# EAGLE board dancing-light-pcb-v2 (EAGLE 8.6.1)
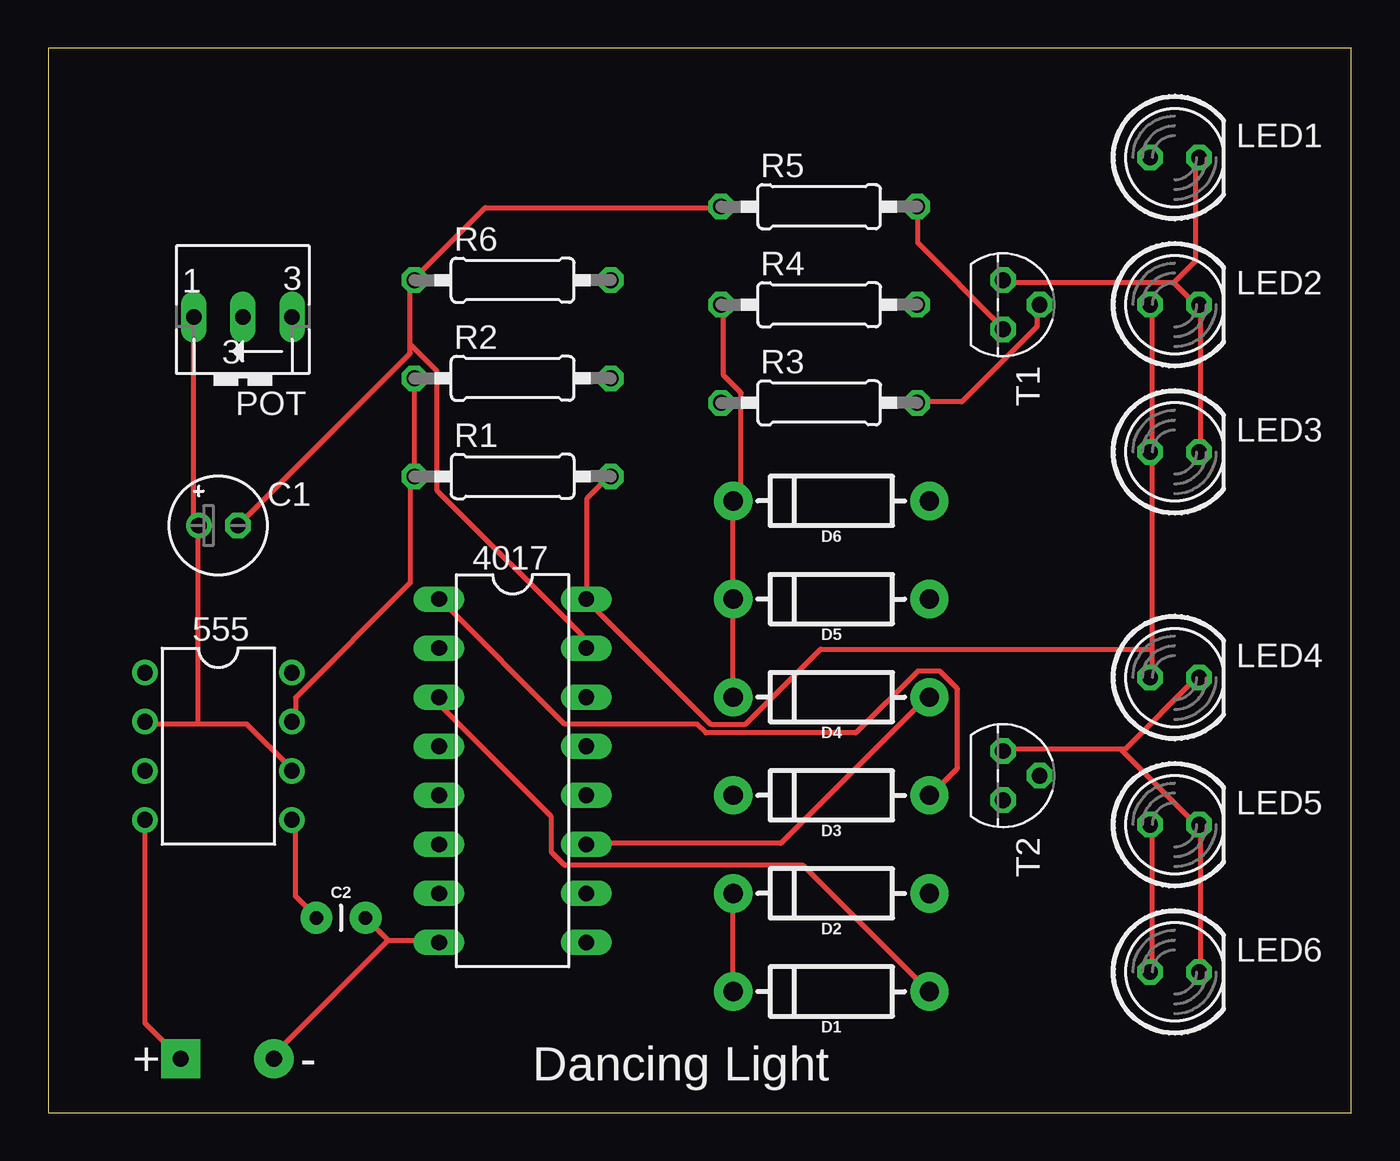
[diagram p0: board, top side]
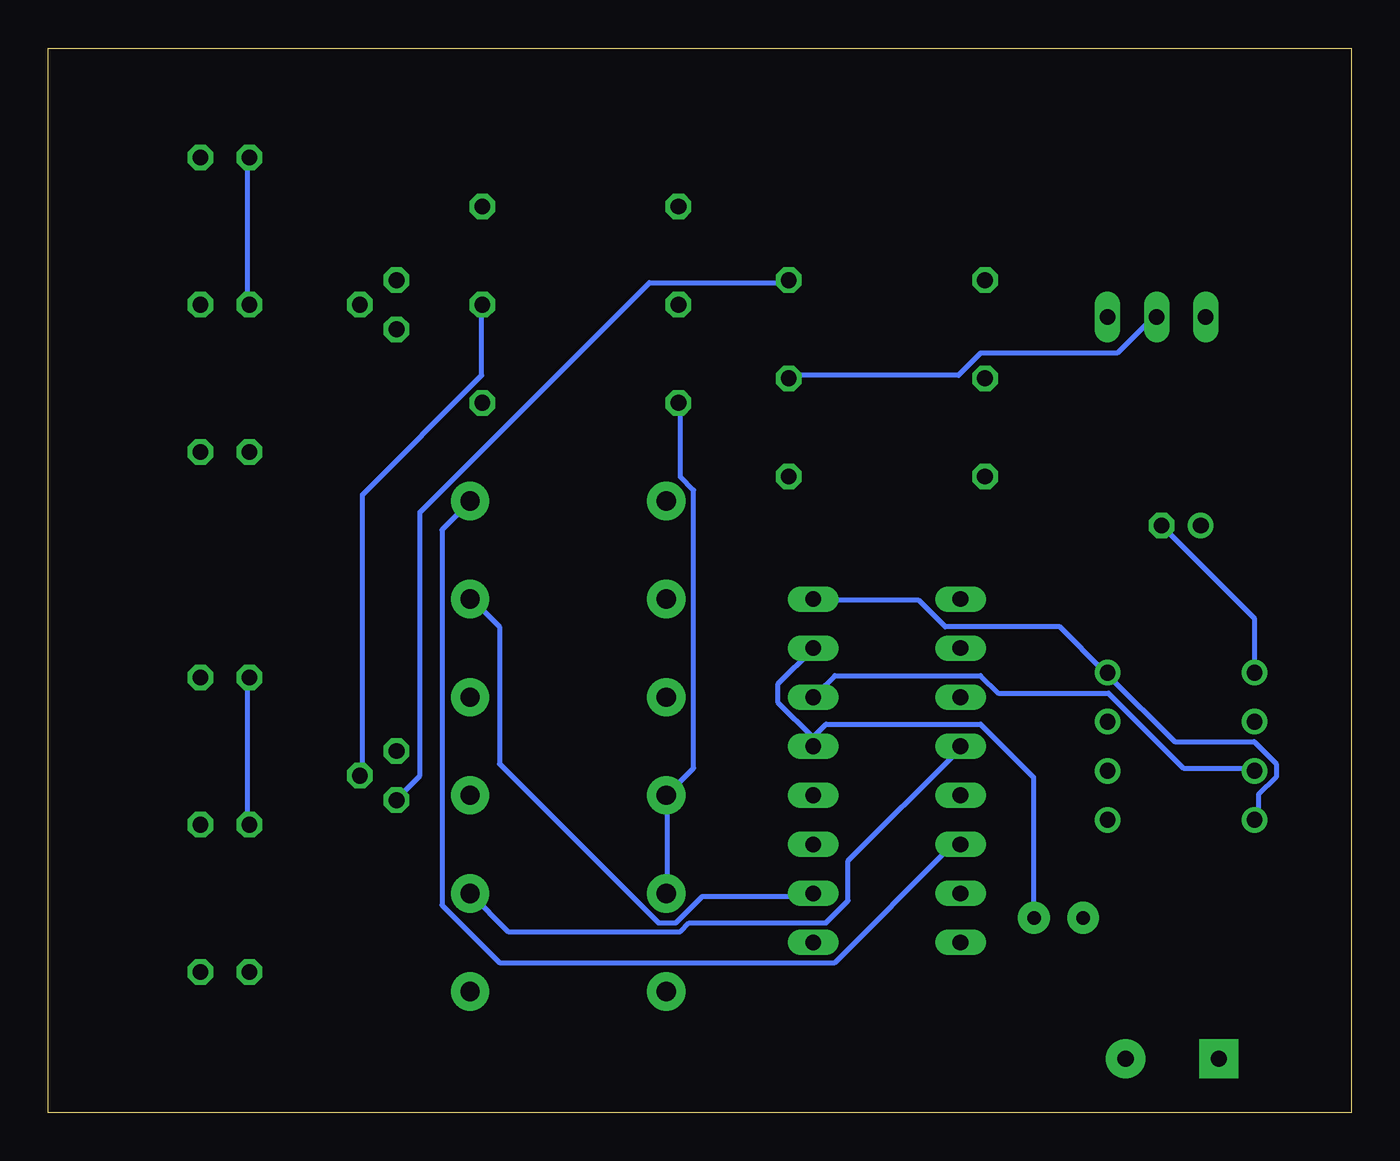
[diagram p1: board, bottom side, seen from below]

Size 67.49 x 55.11 mm. Coordinates in mm from the lower left corner, seen from the top.
Outline: 0,0 67.49,0 67.49,55.11 0,55.11 0,0
Copper layers (1*16): Top 0.035mm / dielectric 1.5mm / Bottom 0.035mm
Design rules "default": minimum track width 10mil, minimum drill 24mil, track to track 8mil, track to pad 8mil, pad to pad 8mil, via to via 8mil, smd to smd 8mil, copper to edge 40mil, drill to drill 8mil, minimum pad ring 10mil, minimum via ring 8mil, stop-mask expansion 4mil, vias tented up to drill 0mil, thermal gap 10mil

## Footprints (pad centres in the part's own frame; a part is rotated, then mirrored left to right if it is on the bottom)
DIL08 = drill 0.813 pad 1.27: 1 -3.81,-3.81; 2 -1.27,-3.81; 3 1.27,-3.81; 4 3.81,-3.81; 5 3.81,3.81; 6 1.27,3.81; 7 -1.27,3.81; 8 -3.81,3.81
DIL16 = drill 0.813 long: 1 -8.89,-3.81; 2 -6.35,-3.81; 3 -3.81,-3.81; 4 -1.27,-3.81; 5 1.27,-3.81; 6 3.81,-3.81; 7 6.35,-3.81; 8 8.89,-3.81; 9 8.89,3.81; 10 6.35,3.81; 11 3.81,3.81; 12 1.27,3.81; 13 -1.27,3.81; 14 -3.81,3.81; 15 -6.35,3.81; 16 -8.89,3.81
E2-5 = drill 0.813 pad 1.27: + -1.016,0 | drill 0.813 pad 1.27 octagon: - 1.016,0
CAP-PTH-2.54 = drill 0.7 pad 1.651: 1 -1.27,0; 2 1.27,0
DIODE-1N4001 = drill 1 pad 1.981: A -5.08,0; C 5.08,0
LED5MM = drill 0.813 octagon: A -1.27,0; K 1.27,0
B25V = drill 0.813 long: A 2.54,0.635; E -2.54,0.635; S 0,0.635
0207/10 = drill 0.813 octagon: 1 -5.08,0; 2 5.08,0
TO92 = drill 0.813 octagon: 1 1.27,0; 2 0,1.905; 3 -1.27,0

## Placement (x,y rotation side)
555  [DIL08]  8.81,18.97 270 top
4017  [DIL16]  24.05,17.7 270 top
C1  4.7uF  [E2-5]  8.81,30.4 0 top
C2  10nF  [CAP-PTH-2.54]  15.16,10.08 0 top
D1  [DIODE-1N4001]  40.56,6.27 180 top
D2  [DIODE-1N4001]  40.56,11.35 180 top
D3  [DIODE-1N4001]  40.56,16.43 180 top
D4  [DIODE-1N4001]  40.56,21.51 180 top
D5  [DIODE-1N4001]  40.56,26.59 180 top
D6  [DIODE-1N4001]  40.56,31.67 180 top
LED1  [LED5MM]  58.34,49.45 0 top
LED2  [LED5MM]  58.34,41.83 0 top
LED3  [LED5MM]  58.34,34.21 0 top
LED4  [LED5MM]  58.34,22.53 0 top
LED5  [LED5MM]  58.34,14.91 0 top
LED6  [LED5MM]  58.34,7.29 0 top
POT  10k‎Ω  [B25V]  10.08,41.83 180 top
R1  1k‎Ω  [0207/10]  24.05,32.94 180 top
R2  20k‎Ω  [0207/10]  24.05,38.02 0 top
R3  200‎Ω  [0207/10]  39.92,36.75 0 top
R4  200‎Ω  [0207/10]  39.92,41.83 0 top
R5  100‎Ω  [0207/10]  39.92,46.91 0 top
R6  100‎Ω  [0207/10]  24.05,43.1 0 top
T1  [TO92]  49.45,41.83 270 top
T2  [TO92]  49.45,17.45 270 top

## Library data of the parts
555 = linear
4017 = 40xx
C1 = rcl
C2 = SparkFun-Capacitors
D1-D6 = SparkFun-DiscreteSemi
LED1-LED6 = led
POT R1-R6 = AUTODESK_CIRCUITS_BREADBOARD
T1 T2 = transistor-npn

## Nets
GND: 555.1 4017.8 4017.13 4017.15 C1.- C2.2 R5.1 R6.1
N$1: 555.5 C2.1
N$2: 555.3 4017.14
N$3: 4017.4 D2.A
N$4: 4017.5
N$5: 4017.6 D6.A
N$6: 4017.7
N$7: 4017.11 D4.A
N$8: 4017.9
N$9: 4017.10 D5.A
N$11: 4017.1 D3.A
N$12: 4017.2
N$13: 4017.3 D1.A
N$14: 555.7 R1.2 R2.1
N$15: D4.C D5.C D6.C R4.1
N$16: LED1.K LED2.K LED3.K T1.3
N$17: R3.2 T1.2
N$18: R5.2 T1.1
N$19: LED4.K LED5.K LED6.K T2.3
N$20: R6.2 T2.1
N$21: 4017.12
N$23: D1.C D2.C D3.C R3.1
N$24: 555.2 555.6 C1.+ POT.A
N$25: R4.2 T2.2
N$26: POT.S R2.2
VCC: 555.4 555.8 4017.16 LED1.A LED2.A LED3.A LED4.A LED5.A LED6.A R1.1

## Tracks (layer width: path | path; a pad name or v marks a point on that pad's centre or on a via)
GND  (via drill 0.84 pad 2.03)
  Top 0.254: 17.6,8.91 20.12,8.91 4017.8 | 17.6,8.91 16.46,10.06 C2.2 | 18.75,39.78 18.75,39.32 C1.- | 18.75,39.78 18.75,42.98 R6.1 18.97,43.2 22.63,46.86 34.75,46.86 R5.1 | 18.75,39.78 20.12,38.41 20.12,32.23 27.66,24.69 27.66,24.23 4017.15 | 17.6,8.91 11.68,3 v11.68,2.79
  Bottom 0.254: 27.89,19.43 27.89,18.97 4017.13 27.89,19.43 | 27.89,19.43 29.72,21.26 29.72,22.17 27.89,24 4017.15 | C1.- 5.03,25.6 5.03,22.86 555.1 | 27.89,19.43 27.2,20.12 19.2,20.12 16.46,17.37 16.46,10.29 C2.2
N$1
  Top 0.254: 555.5 12.8,15.09 12.8,11.2 13.72,10.29 C2.1
N$2
  Bottom 0.254: 555.3 5.03,17.83 8.69,17.83 12.57,21.72 18.29,21.72 19.2,22.63 26.75,22.63 27.66,21.72 4017.14
N$3
  Bottom 0.254: D2.A 43.66,9.37 34.75,9.37 34.29,9.83 27.2,9.83 26.06,10.97 26.06,13.03 20.34,18.75 4017.4
N$5
  Bottom 0.254: 4017.6 20.34,13.72 20.8,13.72 26.75,7.77 44.12,7.77 47.09,10.74 47.09,30.18 45.72,31.55 D6.A
N$7
  Top 0.254: 4017.11 27.89,13.95 37.95,13.95 45.49,21.49 D4.A
N$9
  Bottom 0.254: 4017.10 27.89,11.2 33.6,11.2 34.98,9.83 35.89,9.83 44.12,18.06 44.12,25.15 45.49,26.52 D5.A
N$11
  Top 0.254: 4017.1 20.34,26.52 26.75,20.12 33.6,20.12 34.06,19.66 41.83,19.66 45.03,22.86 46.18,22.86 47.09,21.95 47.09,17.83 45.72,16.46 D3.A
N$13
  Top 0.254: 4017.3 20.34,21.49 20.34,21.03 26.06,15.32 26.06,13.49 26.75,12.8 39.09,12.8 45.49,6.4 D1.A
N$14
  Top 0.254: 555.7 12.8,20.34 12.8,21.49 18.75,27.43 18.75,32.92 R1.2 18.97,33.15 18.97,37.95 R2.1
N$15
  Top 0.254: D4.C 35.43,21.72 35.43,26.52 D5.C 35.43,26.75 35.43,31.55 D6.C 35.66,31.77 35.89,32 35.89,37.26 34.98,38.18 34.98,41.6 R4.1
N$16
  Top 0.254: LED3.K 59.66,34.29 59.66,41.6 LED2.K 59.44,41.83 58.29,42.98 | 58.29,42.98 49.61,42.98 T1.3 | 58.29,42.98 59.44,44.12 59.44,49.38 LED1.K
N$17
  Top 0.254: R3.2 45.03,36.8 47.32,36.8 51.21,40.69 51.21,41.6 T1.2
N$18
  Top 0.254: R5.2 45.03,46.86 45.03,45.03 49.38,40.69 T1.1
N$19
  Top 0.254: LED6.K 59.66,7.39 59.66,14.71 LED5.K 59.44,14.94 55.55,18.82 | 55.55,18.82 55.78,18.82 59.44,22.48 LED4.K | 55.55,18.82 49.61,18.82 T2.3
N$20
  Bottom 0.254: R6.2 29.26,42.98 36.35,42.98 48.23,31.09 48.23,17.45 49.38,16.31 T2.1
N$23
  Top 0.254: D1.C 35.43,6.4 35.43,11.2 D2.C
  Bottom 0.254: R3.1 34.75,36.58 34.75,32.92 34.06,32.23 34.06,17.83 35.43,16.46 D3.C 35.43,16.23 35.43,11.43 D2.C
N$24
  Top 0.254: 7.77,20.12 10.29,20.12 12.57,17.83 555.6 | 7.77,20.12 5.03,20.12 555.2 | 7.77,20.12 7.77,30.18 C1.+ 7.77,30.4 7.54,30.63 7.54,41.15 POT.A
N$25
  Bottom 0.254: R4.2 45.03,41.6 45.03,38.18 51.21,32 51.21,17.45 T2.2
N$26
  Bottom 0.254: R2.2 29.03,38.18 20.34,38.18 19.2,39.32 12.12,39.32 10.29,41.15 POT.S
VCC  (via drill 0.84 pad 2.03)
  Top 0.254: LED6.A 57.15,7.39 57.15,14.71 LED5.A | LED2.A 57.15,41.6 57.15,34.29 LED3.A 57.15,34.06 57.15,24 | 57.15,24 57.15,22.71 LED4.A 56.92,22.48 | R1.1 29.03,32.92 27.89,31.77 27.89,26.75 4017.16 27.89,26.52 34.29,20.12 36.12,20.12 40.01,24 57.15,24 | 555.4 5,4.65 v6.86,2.79
  Bottom 0.254: LED4.A 57.15,22.48 57.15,14.94 LED5.A | LED1.A 57.15,49.38 57.15,41.83 LED2.A | 555.4 4.8,15.32 4.8,16.46 3.89,17.37 3.89,18.06 5.03,19.2 9.14,19.2 12.57,22.63 555.8 12.8,22.86 15.09,25.15 21.03,25.15 22.4,26.52 27.66,26.52 4017.16

## Text on the board
tNames: + | - | Dancing Light